# Altium PCB STC12+CH340E.PcbDoc
Units mm, origin at the board's own origin, x right, y up, seen from the top; angles counter-clockwise.
Board outline 20.32 x 57 mm, 2 copper layers (Top Layer, Bottom Layer); 40 components, 57 nets, 182 pads, 35 vias.
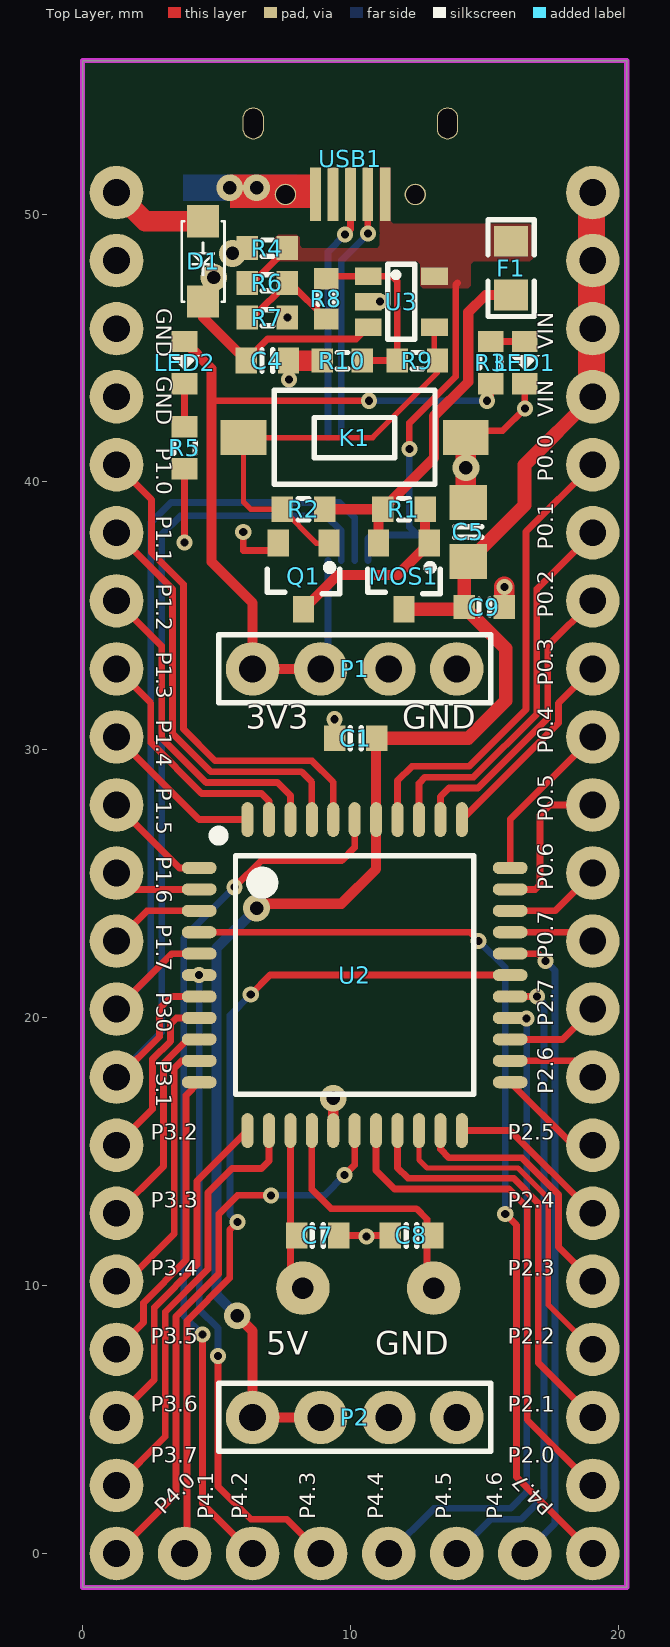
[diagram p0: Top Layer view]
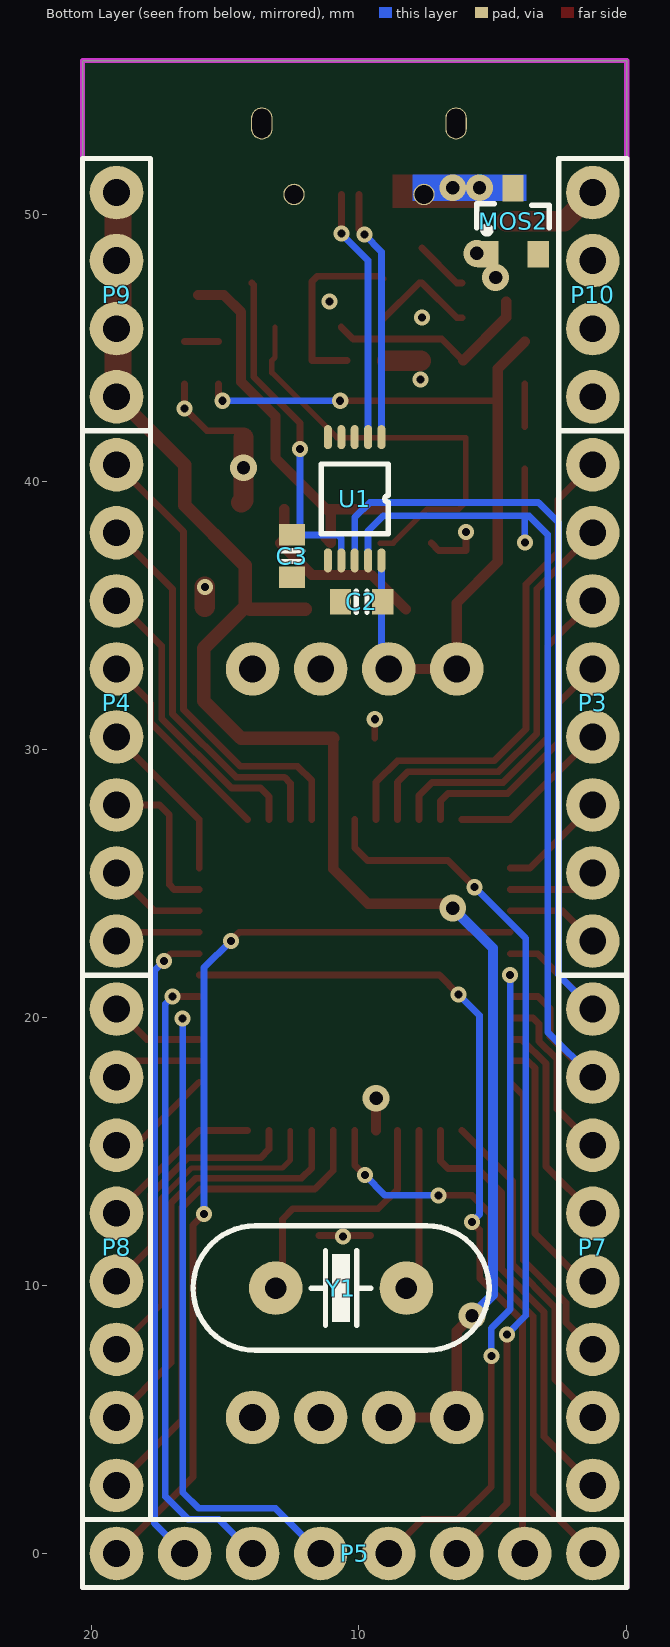
[diagram p1: Bottom Layer view, seen from below]

## Layer stack, top to bottom
Top Solder: solder mask 0.0102, Solder Resist, Dk 3.5
Top Layer: signal copper 0.0356
Dielectric1: dielectric 0.32, FR-4, Dk 4.8
Bottom Layer: signal copper 0.0356
Bottom Solder: solder mask 0.0102, Solder Resist, Dk 3.5

## Board outline
0,-1.27 20.32,-1.27 20.32,55.73 0,55.73

## Design rules (kind name [scope] priority, off if disabled: settings)
Clearance power [InNetClass('power') vs InNetClass('power')] p1: gap=0.254
Clearance [All] p2: gap=0.152
ComponentClearance [All] p1: gap=0 collisioncheckmode=3 verticalgap=0 showdistances=FALSE
PlaneConnect [All] p1: planeconnectstyle=Direct reliefexpansion=0.508 reliefentries=4 reliefconductorwidth=0.254 reliefairgap=0.254
PolygonConnect [All] p1: connectstyle=Direct reliefconductorwidth=0.254 reliefentries=4 polygonreliefangle="90 Angle" airgapwidth=0.254
RoutingVias [All] p1: holewidth=0.3 width=0.6 viastyle="Through Hole" minholewidth=0.3 minwidth=0.6 maxholewidth=6 maxwidth=6.3
SolderMaskExpansion [All] p1: expansion=0.102
Width [All] p1: maxlimit=25.4 minlimit=0.152 preferedwidth=0.254
28 further rules are at their usual default settings.

## Components (designator, comment, footprint, x,y, rotation, side; value= is the part's Value field where it differs from the comment)
C1 "0.1μF" C_0603#1 10.2,30.43 r180 top
C2 "0.1μF" C_0603#1 9.9,35.53 r180 bottom
C3 "0.1μF" C_0603#1 12.5,37.23 r90 bottom
C4 "10nF" C_0603#1 6.9,44.53 r0 top
C5 "22μF 0805" C_0805 14.4,38.13 r90 top
C7 "22pF" C_0603#1 8.78,11.87 r0 top
C8 "22pF" C_0603#1 12.28,11.87 r180 top
C9 "0.1μF" C_0603#2 15,35.33 r0 top
D1 "BZT52C3V3" SOD_123 4.5,48.23 r90 top
F1 "6V 1.1A 0805" FB_0805 16,47.98 r270 top
K1 "TACT SWITCH_2_SMD" "TACT SWITCH_2_SMD" 10.16,41.656 r180 top
LED1 "LED_0603-B" LED_0603-B 16.51,44.45 r270 top
LED2 "LED_0603-G" LED_0603-G 3.81,44.45 r270 top
MOS1 "SI2301" SOT_23_3 12,36.48 r180 top
MOS2 "AO3400A" SOT_23_3 4.25,49.73 r180 bottom
P1 "PIN4" PIN_4 10.16,33.02 r180 top
P2 "PIN4" PIN_4 10.16,5.08 r180 top
P3 "PIN8" PIN_8 1.27,31.75 r270 bottom
P4 "PIN8" PIN_8 19.05,31.75 r90 bottom
P5 "PIN8" PIN_8 10.16,0 r0 bottom
P7 "PIN8" PIN_8 1.27,11.43 r270 bottom
P8 "PIN8" PIN_8 19.05,11.43 r90 bottom
P9 "PIN4" PIN_4 19.05,46.99 r90 bottom
P10 "PIN4" PIN_4 1.27,46.99 r90 bottom
Q1 "2N7002" SOT_23_3 8.25,36.48 r180 top
R1 "100kΩ" R_0603#1 12,38.98 r180 top
R2 "10kΩ" R_0603#1 8.25,38.98 r0 top
R3 "10KΩ" R_0603#1 15.24,44.45 r90 top
R4 "Ω" R_0603#2 6.9,48.73 r0 top
R5 "10KΩ" R_0603#1 3.81,41.275 r270 top
R6 "Ω" R_0603#2 6.9,47.43 r180 top
R7 "Ω" R_0603#2 6.9,46.13 r180 top
R8 "Ω" R_0603#2 9.1,46.83 r270 top
R9 "Ω" R_0603#2 12.5,44.53 r0 top
R10 "Ω" R_0603#2 9.7,44.53 r0 top
U1 "CH340E" MSOP_10 10.16,39.37 r270 bottom
U2 "STC12LEXXS2" LQFP_44 10.16,21.59 r270 top locked
U3 "TL331" SOT_23_5 11.9,46.73 r270 top
USB1 "MICRO USB B" "MICRO USB B" 10,50.73 r0 top
Y1 "11.0592M" CRYSTAL_HC_49US 10.668,9.906 r0 bottom

## Footprints (in the part's own frame and the unit in brackets; to place one, negate y for a bottom-side part, rotate by r counter-clockwise, add the part's x,y. Pads: shape width x height; smd on the part's side, far side on the other; paste and mask are expansions set on the pad)
C_0603#1 [mm]
  rect 0.8x0.96 smd: 1(-0.79,0) 2(0.79,0)
  silkscreen extent -0.2,-0.4 0.2,0.4, body extent -0.76,-0.39 0.76,0.39, height 0.9
C_0603#2 [mm]
  rect 0.8x0.9 smd: 1(-0.75,0) 2(0.75,0)
  silkscreen extent -0.2,-0.3 0.2,0.3, body extent -0.76,-0.39 0.76,0.39, height 0.9
C_0805 [mm]
  rect 1.3x1.4 smd: 1(-1.1,0) 2(1.1,0)
  silkscreen extent -0.2,-0.5 0.2,0.5, body extent -1,-0.63 1,0.62, height 0.78
CRYSTAL_HC_49US [mm]
  round 2 hole 0.8: 1(-2.44,0) 2(2.44,0)
  silkscreen extent -5.53,-2.33 5.53,2.32, body extent -5.52,-2.32 5.53,2.33, height 2.49
FB_0805 [mm]
  rect 1.14x1.27 smd: 1(-1.003,0) 2(1.003,0)
  silkscreen extent -1.8,-0.86 1.8,0.86, body extent -1,-0.62 1,0.63, height 0.85
LED_0603-B [mm]
  rect 0.8x0.96 smd: 1(-0.79,0) 2(0.79,0)
  silkscreen extent -0.28,-0.56 0.28,0.56, body extent -0.85,-0.45 0.85,0.45, height 0.9
LED_0603-G [mm]
  rect 0.8x0.96 smd: 1(-0.79,0) 2(0.79,0)
  silkscreen extent -0.28,-0.56 0.28,0.56, body extent -0.85,-0.45 0.85,0.45, height 0.9
LQFP_44 [mm]
  oval 0.45x1.3 smd: 1(-4,-5.804) 2(-3.2,-5.804) 3(-2.4,-5.804) 4(-1.6,-5.804) 5(-0.8,-5.804) 6(0,-5.804) 7(0.8,-5.804) 8(1.6,-5.804) 9(2.4,-5.804) 10(3.2,-5.804) 11(4,-5.804) 23(4,5.804) 24(3.2,5.804) 25(2.4,5.804) 26(1.6,5.804) 27(0.8,5.804) 28(0,5.804) 29(-0.8,5.804) 30(-1.6,5.804) 31(-2.4,5.804) 32(-3.2,5.804) 33(-4,5.804)
  oval 1.3x0.45 smd: 12(5.804,-4) 13(5.804,-3.2) 14(5.804,-2.4) 15(5.804,-1.6) 16(5.804,-0.8) 17(5.804,0) 18(5.804,0.8) 19(5.804,1.6) 20(5.804,2.4) 21(5.804,3.2) 22(5.804,4) 34(-5.804,4) 35(-5.804,3.2) 36(-5.804,2.4) 37(-5.804,1.6) 38(-5.804,0.8) 39(-5.804,0) 40(-5.804,-0.8) 41(-5.804,-1.6) 42(-5.804,-2.4) 43(-5.804,-3.2) 44(-5.804,-4)
  silkscreen extent -5.33,-5.2 4.45,4.45, body extent -6,-6 6,6, height 1.68
"MICRO USB B" [mm]
  oval 0.8x1.2 hole 0.7 slot 1.1 at 90 deg: 0(-3.625,2.65) 0(3.625,2.65)
  round 0.8 hole 0.7: 0(-2.425,0) 0(2.425,0)
  rect 0.4x2 smd: 1(1.3,0) 2(0.65,0) 3(0,0) 4(-0.65,0) 5(-1.3,0)
  body extent -4.1,-0.11 4.1,5.32, height 2.63
MSOP_10 [mm]
  oval 0.9x0.3 smd: 1(-2.3,1) 2(-2.3,0.5) 3(-2.3,0) 4(-2.3,-0.5) 5(-2.3,-1) 6(2.3,-1) 7(2.3,-0.5) 8(2.3,0) 9(2.3,0.5) 10(2.3,1)
  round 0.5 on Bottom Overlay: 1(-0.8,0.7)
  silkscreen extent -1.3,-1.25 1.3,1.25, body extent -2.51,-1.5 2.51,1.5, height 1.05
PIN_4 [mm]
  round 2 hole 1: 1(-3.81,0) 2(-1.27,0) 3(1.27,0) 4(3.81,0)
  silkscreen extent -5.08,-1.27 5.08,1.27, body extent -5.08,-1.27 5.08,1.27, height 8.51
PIN_8 [mm]
  round 2 hole 1: 1(-8.89,0) 2(-6.35,0) 3(-3.81,0) 4(-1.27,0) 5(1.27,0) 6(3.81,0) 7(6.35,0) 8(8.89,0)
  silkscreen extent -10.16,-1.27 10.16,1.27, body extent -10.16,-1.27 10.16,1.27, height 8.51
R_0603#1 [mm]
  rect 0.8x0.96 smd: 1(-0.79,0) 2(0.79,0)
  silkscreen extent -0.2,-0.4 0.2,0.4, body extent -0.76,-0.38 0.76,0.38, height 0.41
R_0603#2 [mm]
  rect 0.8x0.9 smd: 1(-0.75,0) 2(0.75,0)
  silkscreen extent -0.2,-0.3 0.2,0.3, body extent -0.76,-0.38 0.76,0.38, height 0.41
SOD_123 [mm]
  rect 1.2x1.2 smd: 1(1.5,0) 2(-1.5,0)
  silkscreen extent -1.5,-0.8 1.5,0.8, body extent -1.93,-0.8 1.92,0.9, height 1.42
SOT_23_3 [mm]
  rect 0.8x1 smd: 1(-0.95,-1.235) 2(0.95,-1.235) 3(0,1.235)
  silkscreen extent -1.35,-0.45 1.35,0.65, body extent -1.45,-1.19 1.45,1.19, height 1.02
SOT_23_5 [mm]
  rect 0.65x1 smd: 1(-0.95,-1.235) 2(0,-1.235) 3(0.95,-1.235) 4(0.95,1.235) 5(-0.95,1.235)
  silkscreen extent -1.4,-0.5 1.4,0.5, body extent -1.45,-1.19 1.45,1.19, height 1.02
"TACT SWITCH_2_SMD" [mm]
  rect 1.7x1.3 smd: 1(-4.15,0) 2(4.15,0)
  silkscreen extent -3,-1.76 3,1.74, body extent -4,-1.8 4,1.8, height 2.4

## Part data
C1 C2 C3 C4 C7 C8 C9: library part C_0603
C5: library part C_0805
D1: library part BZT52CxVx
F1: library part FUSE_0805
R1 R2 R3 R4 R5 R6 R7 R8 R9 R10: library part R_0603
U2: library part "STC12LE5AXXS2 - LQPF44"
Y1: library part Crystal_HC_49US

## Via types
v1: diameter 0.6, hole 0.3, Top Layer to Bottom Layer, 27 vias
v2: diameter 1, hole 0.5, Top Layer to Bottom Layer, 8 vias

## Nets (pads, with @x,y where several pads share a name; then routed paths per layer and width w, separated by ;. In a path a pad name is that pad's centre, name@x,y a point inside that pad or via, vN(x,y) a via of type N, cw(c..) or ccw(c..) an arc to the next point about the centre after c; other vN are vias at no path point)
3V3: C2.2 LED2.1 P1.3 P1.4 R3.1 U1.10 | length 30.9
  Top Layer w0.254: 4.817,43.03 v1(10.7,43.03) ; v1(15.1,43.03) 15.24,43.17 R3.1
  Top Layer w0.381: LED2.1 3.81,45.237 4.817,44.23 4.817,43.03 4.817,37.013 6.35,35.48 P1.4 P1.3
  Bottom Layer w0.254: P1.3 9.16,33.29 U1.10 ; v1(10.7,43.03) v1(15.1,43.03)
D+: U1.1@9.16,41.67 USB1.3 | length 9.4
  Top Layer w0.254: v1(9.8,49.23) 10,49.43 USB1.3
  Bottom Layer w0.254: U1.1@9.16,41.67 9.16,48.59 v1(9.8,49.23)
D-: U1.2 USB1.2 | length 9.5
  Top Layer w0.254: v1(10.65,49.28) USB1.2
  Bottom Layer w0.254: U1.2 9.66,48.271 10.65,49.261 v1(10.65,49.28)
GND: C1.2 C2.1 C3.1 C4.2 C5.2 C7.2 C8.2 C9.2 D1.1 K1.1 LED1.2 MOS2.2 P1.1 P1.2 P2.1 P2.2 P10.1 P10.2 P10.3 P10.4 Q1.2 R7.1 R10.1 U1.3 U2.16 U3.2 | length 17.5
  Top Layer w0.254: v1(6,38.13) 6,37.44 7.025,37.44 Q1.2 ; C1.2 v1(9.41,31.14) ; C7.2 C8.2 ; K1.1@14.31,41.91 15.68,41.91 v1(16.51,42.74) LED1.2
  Top Layer w0.381: U2.16 v2(9.36,16.99)
  Top Layer w0.762: P10.4 2.34,49.73 D1.1 ; C4.2 R10.1 ; K1.1 14.31,39.32 C5.2 ; C9.2 v1(15.75,36.08)
  other v1: 10.6,11.83 7.7,43.83 7.65,46.13 11.1,46.73
  other v2: 14.31,40.53
IN_3V3: C4.1 D1.2 MOS2.1 R4.1 U3.3 | length 7.9
  Top Layer w0.254: C4.1 6.91,45.33 10.215,45.33 U3.3
  Top Layer w0.381: D1.2 4.5,46.14 C4.1
  other v2: 4.9,47.63 5.6,48.53
NetC7_1: C7.1 U2.14 Y1.1 | length 6.5
  Top Layer w0.254: U2.14 7.76,9.612 Y1.1@7.974,9.398
NetC8_1: C8.1 U2.15 Y1.2 | length 10
  Top Layer w0.254: U2.15 8.56,13.59 9.28,12.87 12.46,12.87 12.854,12.476 Y1.2@12.854,9.398
NetF1_2: F1.2 MOS1.2 R1.2 R2.2 | length 14.3
  Top Layer w0.381: R2.2 R1.2 ; MOS1.2@11.25,37.915 MOS1.2 11.05,38.82 R1.2 ; F1.2 15.047,46.977 14.4,46.33 14.4,43.731 13.117,42.448 13.117,40.887 R1.2
NetK1_2: K1.2 Q1.1 R2.1 R9.2 U3.4 | length 16.2
  Top Layer w0.203: Q1.1 8.725,37.715 R2.1 6.275,38.98 6.01,39.245 K1.2 10.826,41.656 13.25,44.08 R9.2 13.135,44.645 U3.4
NetLED1_1: LED1.1 R3.2 | length 1.3
  Top Layer w0.254: R3.2 LED1.1
NetLED2_2: LED2.2 R5.1 | length 1.6
  Top Layer w0.254: R5.1 LED2.2
NetMOS1_1: MOS1.1 Q1.3 R1.1 | length 7.1
  Top Layer w0.381: Q1.3 9.535,36.53 11.765,36.53 MOS1.1 12.79,37.875 R1.1
NetMOS2_3: MOS2.3 USB1.0@7.575,50.73 USB1.5
  other v2: 5.5,50.98 6.5,50.98
NetP3_1: P3.1 U2.40 | length 18.7
  Top Layer w0.254: P3.1 2.575,39.335 2.575,37.37 3.769,36.176 3.769,30.775 4.954,29.589 8.561,29.589 9.36,28.79 U2.40
NetP3_2: P3.2 U2.41 | length 15.7
  Top Layer w0.254: P3.2 3.362,36.008 3.362,30.607 4.786,29.183 8.167,29.183 8.56,28.79 U2.41
NetP3_3: P3.3 U2.42 | length 12.4
  Top Layer w0.254: P3.3 2.956,33.874 2.956,30.438 4.618,28.776 7.274,28.776 7.76,28.29 U2.42
NetP3_4: P3.4 U2.43 | length 9.3
  Top Layer w0.254: P3.4 2.549,31.741 2.549,30.27 4.449,28.37 6.68,28.37 6.96,28.09 U2.43
NetP3_5: P3.5 U2.44 | length 6.2
  Top Layer w0.254: P3.5 4.356,27.394 U2.44
NetP3_6: P3.6 U2.1 | length 4.1
  Top Layer w0.254: P3.6 3.62,25.59 U2.1
NetP3_7: P3.7 U2.2 | length 3.3
  Top Layer w0.254: P3.7 1.88,24.79 U2.2
NetP3_8: P3.8 U2.3 | length 3.6
  Top Layer w0.254: P3.8 2.4,23.99 U2.3
NetP4_1: P4.1 U2.30 | length 3.2
  Top Layer w0.254: U2.30 18.72,23.19 P4.1
NetP4_2: P4.2 U2.31 | length 3.7
  Top Layer w0.254: U2.31 17.64,23.99 P4.2
NetP4_3: P4.3 U2.32 | length 5.9
  Top Layer w0.254: U2.32 16.9,24.79 17.08,24.97 17.08,27.57 17.45,27.94 P4.3
NetP4_4: P4.4 U2.33 | length 6.2
  Top Layer w0.254: U2.33 15.964,27.394 P4.4
NetP4_5: P4.5 U2.34 | length 7.7
  Top Layer w0.254: U2.34 17.771,31.005 17.771,31.741 P4.5
NetP4_6: P4.6 U2.35 | length 11.2
  Top Layer w0.254: U2.35 13.36,28.25 13.68,28.57 14.761,28.57 17.364,31.173 17.364,33.874 P4.6
NetP4_7: P4.7 U2.36 | length 14.5
  Top Layer w0.254: U2.36 12.56,28.75 12.786,28.976 14.593,28.976 16.958,31.341 16.958,36.008 P4.7
NetP4_8: P4.8 U2.37 | length 17.5
  Top Layer w0.254: U2.37 11.76,28.85 12.293,29.383 14.425,29.383 16.551,31.51 16.551,38.141 P4.8
NetP5_1: P5.1 U2.17 | length 21.4
  Top Layer w0.254: P5.1 3.494,2.224 3.494,8.851 5.086,10.443 5.086,12.676 5.78,13.37 v1(7.03,13.37) ; v1(9.78,14.12) 10.16,14.5 U2.17
  Bottom Layer w0.254: v1(7.03,13.37) 9.03,13.37 v1(9.78,14.12)
NetP5_2: P5.2 U2.28 | length 32.2
  Top Layer w0.254: P5.2 P5.2@3.901,0.091 ; P5.2@3.999,0.189 P5.2@3.901,0.091 ; v1(5.78,12.37) 5.493,12.083 5.493,10.275 3.901,8.682 P5.2@3.901,0.091 ; v1(6.28,20.87) 7,21.59 U2.28
  Bottom Layer w0.254: v1(5.78,12.37) 5.5,12.65 5.5,20.09 v1(6.28,20.87)
NetP5_3: P5.3 U2.39 | length 32.9
  Top Layer w0.254: v1(4.48,8.17) 4.48,1.87 P5.3 ; v1(5.68,24.87) 6.68,25.87 9.68,25.87 10.16,26.35 U2.39
  Bottom Layer w0.254: v1(4.48,8.17) 3.777,8.873 3.777,22.967 v1(5.68,24.87)
NetP5_4: P5.4 U2.6 | length 24.5
  Top Layer w0.254: v1(5.059,7.37) 5.059,2.5 6.28,1.279 7.611,1.279 P5.4 P5.4@8.656,0
  Bottom Layer w0.254: v1(4.356,21.59) 4.356,9.113 5.059,8.41 v1(5.059,7.37)
NetP5_5: P5.5 U2.26 | length 23.8
  Bottom Layer w0.254: P5.5 13.116,1.686 15.98,1.686 16.58,2.286 v1(16.58,19.97)
NetP5_6: P5.6 U2.27 | length 23.9
  Top Layer w0.254: U2.27 v1(16.96,20.79)
  Bottom Layer w0.254: P5.6 15.249,1.279 16.38,1.279 17.231,2.13 17.231,20.519 v1(16.96,20.79)
NetP5_7: P5.7 U2.29 | length 24.2
  Top Layer w0.254: U2.29 17.01,22.39 v1(17.28,22.12)
  Bottom Layer w0.254: P5.7 17.637,1.127 17.637,21.763 v1(17.28,22.12)
NetP7_3: P7.3 U2.8 | length 6.5
  Top Layer w0.254: P7.3 2.614,16.584 2.614,18.453 3.28,19.119 3.28,19.77 3.5,19.99 U2.8
NetP7_4: P7.4 U2.9 | length 8
  Top Layer w0.254: P7.4 3.02,14.45 3.02,18.285 3.925,19.19 U2.9
NetP7_5: P7.5 U2.10 | length 10.1
  Top Layer w0.254: P7.5 1.64,10.16 3.427,11.947 3.427,18.117 3.7,18.39 U2.10
NetP7_6: P7.6 U2.11 | length 11.2
  Top Layer w0.254: P7.6 2.275,8.625 2.275,9.356 3.867,10.948 3.867,17.101 U2.11
NetP7_7: P7.7 U2.12 | length 12.7
  Top Layer w0.254: P7.7 2.681,6.491 2.681,9.187 4.274,10.78 4.274,13.9 U2.12
NetP7_8: P7.8 U2.13 | length 16.2
  Top Layer w0.254: P7.8 3.088,4.358 3.088,9.019 4.68,10.611 4.68,13.47 5.58,14.37 6.68,14.37 6.96,14.65 U2.13
NetP8_1: P8.1 U2.18 | length 19.1
  Top Layer w0.254: U2.18 10.96,14.29 11.648,13.602 15.921,13.602 16.602,12.921 16.602,4.988 P8.1
NetP8_2: P8.2 U2.19 | length 16
  Top Layer w0.254: U2.19 11.76,14.39 12.142,14.008 16.09,14.008 17.009,13.089 17.009,7.121 P8.2
NetP8_3: P8.3 U2.20 | length 12.8
  Top Layer w0.203: U2.20 12.56,14.69 12.861,14.389 16.247,14.389 17.39,13.247 17.39,9.28 P8.3
NetP8_4: P8.4 U2.21 | length 10
  Top Layer w0.254: U2.21 13.36,15.09 13.68,14.77 16.405,14.77 17.771,13.405 17.771,11.439 P8.4 P8.4@18.648,10.16
NetP8_5: P8.5 U2.22 | length 6.2
  Top Layer w0.254: U2.22 15.964,15.786 P8.5
NetP8_6: P8.6 U2.23 | length 4.1
  Top Layer w0.254: U2.23 18.314,15.24 P8.6
NetP8_7: P8.7 U2.24 | length 3.3
  Top Layer w0.254: U2.24 18.44,18.39 P8.7
NetP8_8: P8.8 U2.25 | length 3.6
  Top Layer w0.254: U2.25 17.92,19.19 P8.8
NetR6_1: R6.1 R7.2 R8.2 | length 4
  Top Layer w0.254: R7.2 6.35,46.13 R6.1 7.75,47.43 R8.2
NetR8_1: R8.1 R9.1 R10.2 U3.1 | length 7
  Top Layer w0.254: R8.1 9.2,47.68 U3.1 11.55,47.68 11.75,47.48 R9.1 R10.2
RST: P5.8 U2.4 | length 35.2
  Top Layer w0.254: U2.4 14.46,23.19 v1(14.78,22.87) ; v1(15.78,12.67) 16.196,12.254 16.196,2.854 P5.8
  Bottom Layer w0.254: v1(14.78,22.87) 15.78,21.87 v1(15.78,12.67)
RXD: P7.1 U1.8 U2.5 | length 32.4
  Top Layer w0.254: P7.1 3.34,22.39 U2.5
  Bottom Layer w0.254: P7.1 2.549,21.599 2.549,38.479 3.305,39.235 9.595,39.235 10.16,38.67 U1.8
TXD: P7.2 R5.2 U1.9 U2.7 | length 38
  Top Layer w0.254: P7.2 1.366,17.78 2.874,19.288 2.874,20.345 3.319,20.79 U2.7 ; v1(3.81,37.74) R5.2
  Bottom Layer w0.254: P7.2 2.956,19.466 2.956,38.036 3.655,38.735 3.9,38.735 ; v1(3.81,37.74) 3.81,38.645 3.9,38.735 ; U1.9 9.66,38.17 9.095,38.735 3.9,38.735
VCC: C1.1 C5.1 C9.1 MOS1.3 P2.3 P2.4 P9.1 P9.2 P9.3 P9.4 U2.38 | length 62
  Top Layer w0.381: v2(5.78,8.87) 6.35,8.3 P2.4 P2.3 ; v2@6.28,23.87 v2(6.5,24.09) 6.665,24.255 9.665,24.255 10.96,25.55 U2.38 C1.1@10.96,30.4
  Top Layer w0.508: C1.1 14.4,30.43 15.8,31.83 15.8,33.78 C9.1 14.25,36.88 C5.1 16.5,39.13 16.5,40.63 P9.1 P9.2 P9.3 P9.4 ; MOS1.3 C9.1@14.055,35.245
  Bottom Layer w0.381: v2(5.78,8.87) 4.999,9.651 4.999,22.589 v2(6.5,24.09)
VIN: C3.2 F1.1 R4.2 R6.2 U1.7 U3.5 USB1.1 | length 15
  Top Layer w0.254: R6.2 6.35,47.43 R4.2 ; v1(12.2,41.23) 12.2,42.195 13.93,43.926 13.93,47.36 14,47.43
  Bottom Layer w0.254: U1.7 10.66,37.89 10.79,38.02 C3.2 12.2,38.32 v1(12.2,41.23)
pads on no net: U1.1@9.46,40.17 U1.4 U1.5 U1.6 USB1.0@6.375,53.38 USB1.0@12.425,50.73 USB1.0@13.625,53.38 USB1.4

## Polygon pours and split planes (outlines as drawn)
VIN on Top Layer "Top Layer-No Net" (solid, pour order 2): 11.1,51.73 11.1,48.83 11,48.73 8.2,48.73 8.1,48.83 8.1,49.13 8,49.23 7.3,49.23 7.2,49.13 7.2,48.33 7.3,48.23 9.6,48.23 12.5,48.23 12.6,48.13 12.6,47.33 12.7,47.23 14.4,47.23 14.5,47.33 14.5,48.13 14.6,48.23 16.7,48.23 16.8,48.33 16.8,49.53 16.7,49.63 11.6,49.63 11.5,49.73 11.5,51.73 11.1,51.73

## Keep-outs
Keep-Out Layer:
  the board outline again, w0.2

## Other copper
Top Layer:
  rectangle net VCC: 18.5,42.48 19.5,51.48
  rectangle net NetMOS2_3: 5.5,50.23 8.75,51.48
Bottom Layer:
  rectangle net NetMOS2_3: 3.75,50.48 8,51.48
  pour cut-out: 0,41.91 2.032,41.91 2.54,41.402 2.54,1.27 0,1.27
  pour cut-out: 18.288,52.07 20.32,52.07 20.32,1.23 20.28,1.27 17.78,1.27 17.78,51.562
  pour cut-out: 0,1.27 20.32,1.27 20.32,-1.27 0,-1.27

## Silkscreen, mask and mechanical layers (free items; w line width, h text height)
Top Overlay:
  text "GND" at 2.54,46.482 h1 r270
  text "VIN" at 17.78,44.958 h1 r90
  text "GND" at 2.54,43.942 h1 r270
  text "VIN" at 17.78,42.418 h1 r90
  text "P1.0" at 2.54,41.275 h1 r270
  text "P0.0" at 17.78,40.005 h1 r90
  text "P1.1" at 2.54,38.735 h1 r270
  text "P0.1" at 17.78,37.465 h1 r90
  text "P1.2" at 2.54,36.195 h1 r270
  text "P0.2" at 17.78,34.925 h1 r90
  text "P1.3" at 2.54,33.655 h1 r270
  text "P0.3" at 17.78,32.385 h1 r90
  text "P1.4" at 2.54,31.115 h1 r270
  text "3V3" at 6.096,30.48 h1.5
  text "GND" at 11.938,30.48 h1.5
  text "P0.4" at 17.78,29.845 h1 r90
  text "P1.5" at 2.54,28.575 h1 r270
  text "P0.5" at 17.78,27.305 h1 r90
  text "P1.6" at 2.54,26.035 h1 r270
  text "P0.6" at 17.78,24.765 h1 r90
  text "P1.7" at 2.54,23.495 h1 r270
  text "P0.7" at 17.78,22.225 h1 r90
  text "P30" at 2.54,20.955 h1 r270
  text "P2.7" at 17.78,19.685 h1 r90
  text "P3.1" at 2.54,18.415 h1 r270
  text "P2.6" at 17.78,17.145 h1 r90
  text "P3.2" at 2.54,15.24 h1
  text "P2.5" at 15.875,15.24 h1
  text "P3.3" at 2.54,12.7 h1
  text "P2.4" at 15.875,12.7 h1
  text "P3.4" at 2.54,10.16 h1
  text "P2.3" at 15.875,10.16 h1
  text "P3.5" at 2.54,7.62 h1
  text "P2.2" at 15.875,7.62 h1
  text "5V" at 6.858,7.112 h1.5
  text "GND" at 10.922,7.112 h1.5
  text "P3.6" at 2.54,5.08 h1
  text "P2.1" at 15.875,5.08 h1
  text "P3.7" at 2.54,3.175 h1
  text "P2.0" at 15.875,3.175 h1
  text "P4.7" at 17.78,1.905 h1 r135
  text "P4.0" at 3.175,1.27 h1 r45
  text "P4.1" at 5.08,1.27 h1 r90
  text "P4.2" at 6.35,1.27 h1 r90
  text "P4.3" at 8.89,1.27 h1 r90
  text "P4.4" at 11.43,1.27 h1 r90
  text "P4.5" at 13.97,1.27 h1 r90
  text "P4.6" at 15.875,1.27 h1 r90